# Altium PCB BPQ.PcbDoc (part 2 of 2)
Units mm, origin at the board's own origin, x right, y up, seen from the top; angles counter-clockwise.
Board outline 200.03 x 149.99 mm, 2 copper layers (Top Layer, Bottom Layer); 132 components, 80 nets, 460 pads, 79 vias.
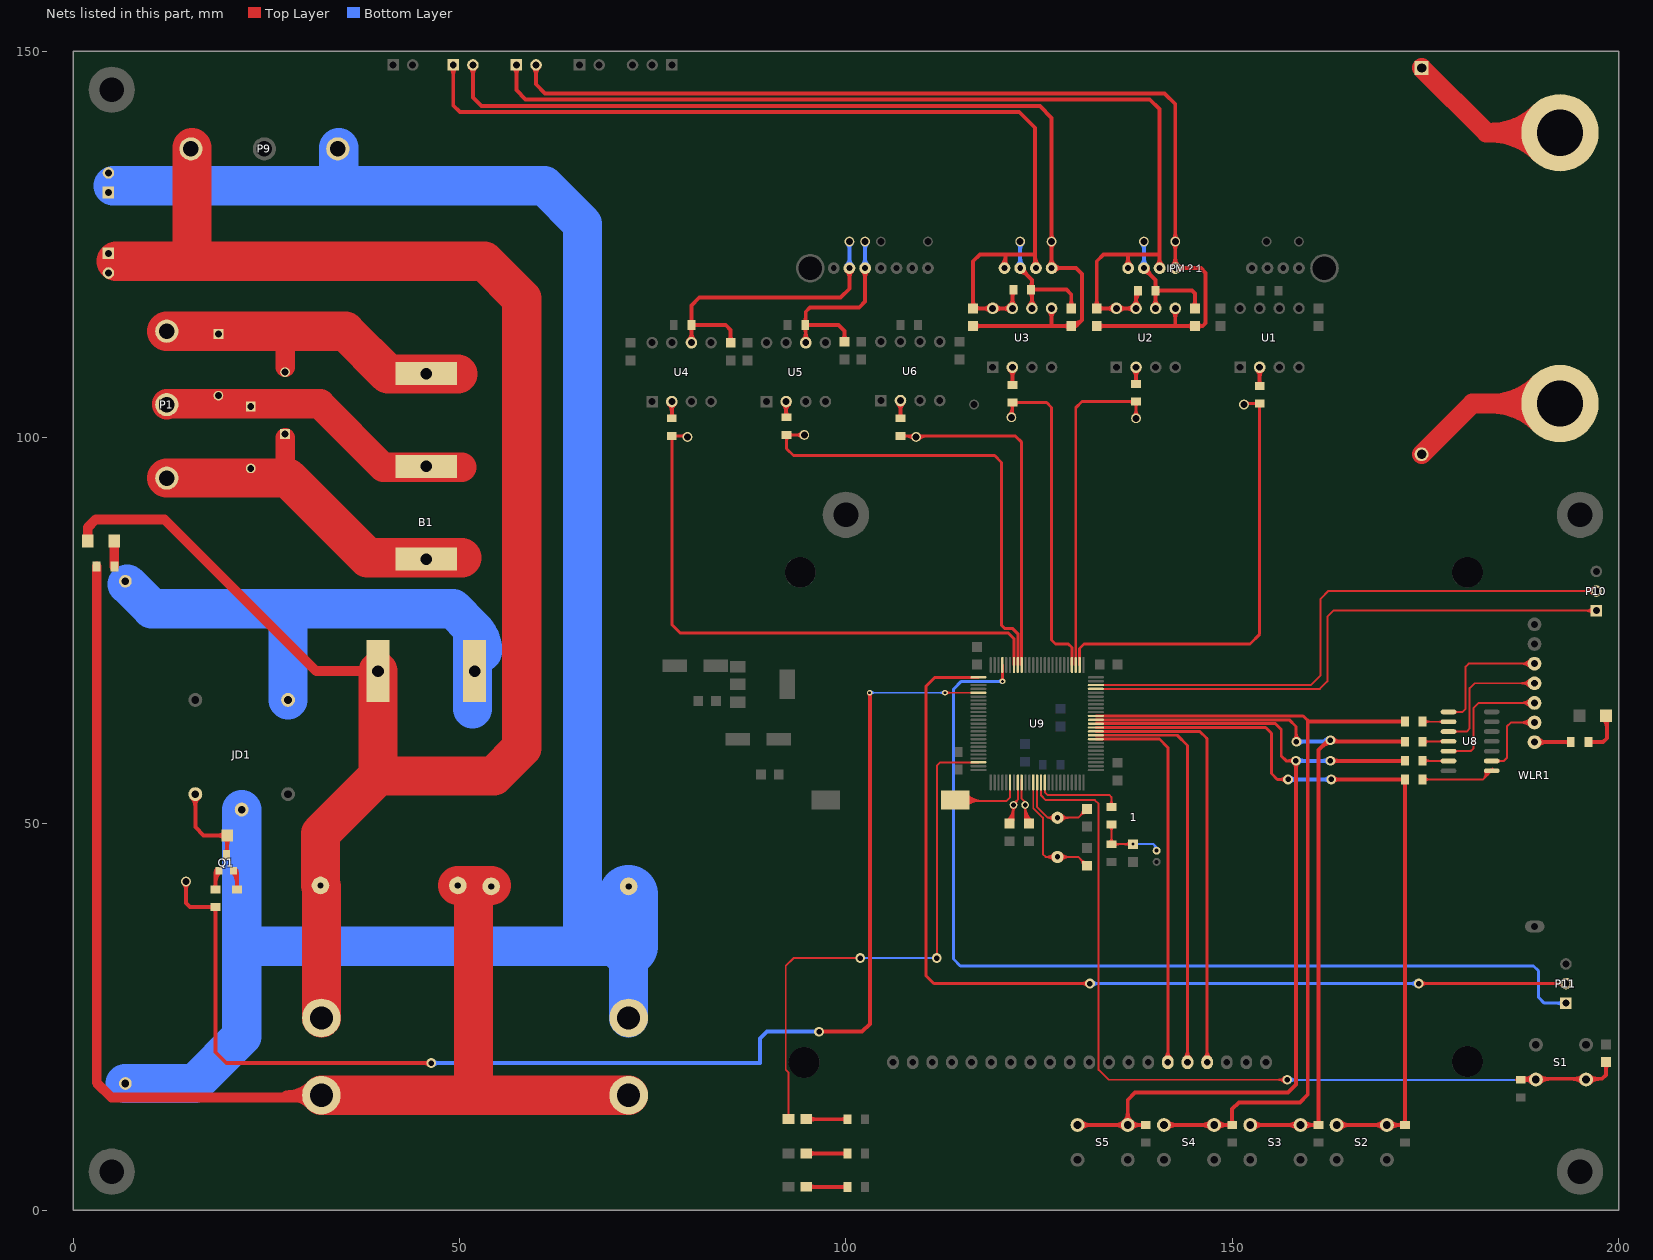
[diagram p2: the nets of this part, all layers, seen from the top]

## Via types
v1: diameter 0.635, hole 0.635, Top Layer to Bottom Layer, 40 vias
v2: diameter 1.27, hole 0.711, Top Layer to Bottom Layer, 23 vias
v3: diameter 0.762, hole 0.381, Top Layer to Bottom Layer, 15 vias
v4: diameter 1.016, hole 0.61, Top Layer to Bottom Layer, 1 vias

## Nets (pads, with @x,y where several pads share a name; then routed paths per layer and width w, separated by ;. In a path a pad name is that pad's centre, name@x,y a point inside that pad or via, vN(x,y) a via of type N, cw(c..) or ccw(c..) an arc to the next point about the centre after c; other vN are vias at no path point) (continued)
IPM_VGND: C2.1 C8.1 IPM？1.5 P4.2 TP15.0 U2.5 | length 149.6
  Top Layer w0.508: P4.2@59.551,147.858 cw(c58.704,147.012) 59.902,147.012 cw(c61.099,147.012) P4.2@60.252,147.858 ; P4.2@59.902,148.209 59.902,145.711 61.087,144.526 141.224,144.526 142.621,143.129 IPM？1.5@142.621,121.92 145.923,121.92 146.558,121.285 146.558,114.808 146.177,114.427 C8.1@145.161,114.427 142.621,114.427 ; C2.1@132.461,114.427 142.621,114.427 ; C2.1@132.73,114.158 cw(c133.381,113.507) 133.381,114.427 cw(c133.381,115.347) C2.1@132.73,114.696 ; IPM？1.5@142.262,122.279 ccw(c141.395,123.146) 142.621,123.146 ccw(c143.847,123.146) 142.98,122.279 ccw(c143.847,123.146) 143.847,121.92 ccw(c143.847,120.694) IPM？1.5@142.98,121.561 ; U2.5@142.27,116.362 cw(c141.424,115.516) 142.621,115.516 cw(c143.818,115.516) U2.5@142.972,116.362 ; TP15.0@142.352,125.08 cw(c141.701,124.429) 142.621,124.429 cw(c143.541,124.429) TP15.0@142.89,125.08 ; TP15.0@142.352,125.618 ccw(c141.701,126.269) 142.621,126.269 ccw(c143.541,126.269) TP15.0@142.89,125.618 ; U2.5@142.621,116.713 142.621,114.427 ; C8.1@144.892,114.158 ccw(c144.241,113.507) 144.241,114.427 ccw(c144.241,115.347) C8.1@144.892,114.696 ; C8.1@145.43,114.158 cw(c146.081,113.507) 146.081,114.427 cw(c146.081,115.347) C8.1@145.43,114.696
IPM_VN: C11.2 IPM？1.17 R14.2 TP11.0 U5.6 | length 37.6
  Top Layer w0.508: U5.6@94.455,112.619 ccw(c93.608,113.465) 94.805,113.465 ccw(c96.003,113.465) U5.6@95.156,112.619 ; R14.2@94.562,114.247 cw(c93.975,113.66) 94.805,113.66 ; R14.2@94.562,114.861 ccw(c93.975,115.448) 94.805,115.448 ; U5.6@94.805,112.268 R14.2@94.805,114.554 ; R14.2@94.922,114.374 cw(c95.355,113.941) 95.355,114.554 cw(c95.355,115.167) R14.2@94.922,114.734 ; C11.2@99.553,112.664 ccw(c98.902,113.315) 99.822,113.315 ccw(c100.742,113.315) C11.2@100.091,112.664 ; C11.2@99.822,112.395 99.822,113.792 99.06,114.554 R14.2@94.805,114.554 ; IPM？1.17@102.13,121.561 cw(c101.263,120.694) 102.489,120.694 cw(c103.715,120.694) IPM？1.17@102.848,121.561 ; IPM？1.17@102.489,121.92 102.489,117.602 101.727,116.84 95.377,116.84 94.805,116.268 R14.2@94.805,114.554
  Bottom Layer w0.508: IPM？1.17@102.13,122.279 ccw(c101.263,123.146) 102.489,123.146 ccw(c103.715,123.146) IPM？1.17@102.848,122.279 ; TP11.0@102.22,125.08 cw(c101.569,124.429) 102.489,124.429 cw(c103.409,124.429) TP11.0@102.758,125.08 ; IPM？1.17@102.489,121.92 TP11.0@102.489,125.349
IPM_VP: C8.2 IPM？1.7 R11.2 TP8.0 U2.6 | length 27.9
  Top Layer w0.508: IPM？1.7@138.557,121.412 cw(c138.557,120.186) 139.424,121.053 cw(c140.291,121.92) IPM？1.7@139.065,121.92 ; IPM？1.7@138.557,121.92 140.081,120.396 R11.2@140.081,118.999 ; U2.6@139.73,117.064 ccw(c138.884,117.91) 140.081,117.91 ccw(c141.278,117.91) U2.6@140.432,117.064 ; R11.2@139.901,118.692 cw(c139.468,118.259) 140.081,118.259 cw(c140.694,118.259) R11.2@140.261,118.692 ; R11.2@139.901,119.306 ccw(c139.468,119.739) 140.081,119.739 ccw(c140.694,119.739) R11.2@140.261,119.306 ; U2.6@140.081,116.713 R11.2@140.081,118.999 ; R11.2@140.261,118.819 cw(c140.694,118.386) 140.694,118.999 cw(c140.694,119.612) R11.2@140.261,119.179 ; C8.2@144.892,116.982 ccw(c144.241,117.633) 145.161,117.633 ccw(c146.081,117.633) C8.2@145.43,116.982 ; C8.2@145.161,116.713 145.161,118.618 144.78,118.999 R11.2@140.081,118.999
  Bottom Layer w0.508: IPM？1.7@138.198,122.279 ccw(c137.331,123.146) 138.557,123.146 ccw(c139.783,123.146) IPM？1.7@138.916,122.279 ; TP8.0@138.288,125.08 cw(c137.637,124.429) 138.557,124.429 cw(c139.477,124.429) TP8.0@138.826,125.08 ; IPM？1.7@138.557,121.92 TP8.0@138.557,125.349
IPM_VVCC: C2.2 IPM？1.6 IPM？1.8 P4.1 R11.1 U2.7 U2.8 | length 148.9
  Top Layer w0.508: P4.1@57.011,147.858 cw(c56.164,147.012) 57.362,147.012 cw(c58.559,147.012) P4.1@57.712,147.858 ; P4.1@57.362,148.209 57.362,144.949 58.547,143.764 139.319,143.764 140.589,142.494 140.589,123.825 ; C2.2@132.192,116.982 ccw(c131.541,117.633) 132.461,117.633 ccw(c133.381,117.633) 132.73,116.982 ccw(c133.381,117.633) 133.381,116.713 ccw(c133.381,115.793) C2.2@132.73,116.444 ; U2.8@134.65,116.362 ccw(c133.804,115.516) 133.804,116.713 ccw(c133.804,117.91) U2.8@134.65,117.064 ; U2.8@135.352,116.362 cw(c136.198,115.516) 136.198,116.713 cw(c136.198,117.91) U2.8@135.352,117.064 ; IPM？1.8@136.166,122.279 ccw(c135.299,123.146) 136.525,123.146 ccw(c137.751,123.146) IPM？1.8@136.884,122.279 ; IPM？1.8@136.525,121.92 136.525,123.571 ; U2.7@137.19,116.362 ccw(c136.344,115.516) 136.344,116.713 ccw(c136.344,117.91) 137.19,117.064 ccw(c136.344,117.91) 137.541,117.91 ccw(c138.738,117.91) U2.7@137.892,117.064 ; 137.541,117.646 cw(c139.021,117.646) R11.1@137.975,118.692 ; R11.1@137.541,118.872 U2.7@137.541,116.713 U2.8@135.001,116.713 C2.2@132.461,116.713 132.461,122.809 133.35,123.698 140.462,123.698 140.589,123.825 ; IPM？1.6@140.23,122.279 ccw(c139.363,123.146) 140.589,123.146 ccw(c141.815,123.146) IPM？1.6@140.948,122.279 ; IPM？1.6@140.589,121.92 140.589,123.825
IPM_WGND: C3.1 C9.1 IPM？1.9 P5.2 TP16.0 U3.5 | length 142.1
  Top Layer w0.508: P5.2@51.381,147.858 cw(c50.534,147.012) 51.731,147.012 cw(c52.929,147.012) P5.2@52.082,147.858 ; P5.2@51.731,148.209 51.731,143.976 52.832,142.875 125.095,142.875 126.619,141.351 IPM？1.9@126.619,121.92 129.794,121.92 130.556,121.158 130.556,115.189 ; C3.1@116.459,114.427 C9.1@129.159,114.427 129.794,114.427 130.556,115.189 ; C3.1@116.728,114.158 cw(c117.379,113.507) 117.379,114.427 cw(c117.379,115.347) C3.1@116.728,114.696 ; IPM？1.9@126.26,122.279 ccw(c125.393,123.146) 126.619,123.146 ccw(c127.845,123.146) 126.978,122.279 ccw(c127.845,123.146) 127.845,121.92 ccw(c127.845,120.694) IPM？1.9@126.978,121.561 ; U3.5@126.268,116.362 cw(c125.422,115.516) 126.619,115.516 cw(c127.816,115.516) U3.5@126.97,116.362 ; TP16.0@126.35,125.08 cw(c125.699,124.429) 126.619,124.429 cw(c127.539,124.429) TP16.0@126.888,125.08 ; TP16.0@126.35,125.618 ccw(c125.699,126.269) 126.619,126.269 ccw(c127.539,126.269) TP16.0@126.888,125.618 ; 126.619,114.554 U3.5@126.619,116.713 ; C9.1@128.89,114.158 ccw(c128.239,113.507) 128.239,114.427 ccw(c128.239,115.347) C9.1@128.89,114.696 ; C9.1@129.132,114.303 ccw(c129.307,115.117) 129.895,114.528 ; C9.1@129.239,114.8 ccw(c129.539,116.206) 130.556,115.189
IPM_WN: C10.2 IPM？1.18 R13.2 TP10.0 U4.6 | length 50.8
  Top Layer w0.508: U4.6@79.659,112.619 ccw(c78.813,113.465) 80.01,113.465 ccw(c81.207,113.465) U4.6@80.361,112.619 ; R13.2@79.83,114.247 cw(c79.397,113.814) 80.01,113.814 cw(c80.623,113.814) R13.2@80.19,114.247 ; R13.2@79.83,114.861 ccw(c79.397,115.294) 80.01,115.294 ccw(c80.623,115.294) R13.2@80.19,114.861 ; U4.6@80.01,112.268 R13.2@80.01,114.554 ; R13.2@80.19,114.374 cw(c80.623,113.941) 80.623,114.554 cw(c80.623,115.167) R13.2@80.19,114.734 ; C10.2@84.821,112.537 ccw(c84.17,113.188) 85.09,113.188 ccw(c86.01,113.188) C10.2@85.359,112.537 ; C10.2@85.09,112.268 85.09,113.919 84.455,114.554 R13.2@80.01,114.554 ; IPM？1.18@100.098,121.561 cw(c99.231,120.694) 100.457,120.694 cw(c101.683,120.694) IPM？1.18@100.816,121.561 ; IPM？1.18@100.457,121.92 100.457,119.253 99.314,118.11 81.026,118.11 80.01,117.094 R13.2@80.01,114.554
  Bottom Layer w0.508: IPM？1.18@100.098,122.279 ccw(c99.231,123.146) 100.457,123.146 ccw(c101.683,123.146) IPM？1.18@100.816,122.279 ; TP10.0@100.188,125.08 cw(c99.537,124.429) 100.457,124.429 cw(c101.377,124.429) TP10.0@100.726,125.08 ; IPM？1.18@100.457,121.92 TP10.0@100.457,125.349
IPM_WP: C9.2 IPM？1.11 R12.2 TP9.0 U3.6 | length 27.7
  Top Layer w0.508: IPM？1.11@122.555,121.412 cw(c122.555,120.186) 123.422,121.053 cw(c124.289,121.92) IPM？1.11@123.063,121.92 ; IPM？1.11@122.555,121.92 124.079,120.396 R12.2@124.079,119.126 ; U3.6@123.728,117.064 ccw(c122.882,117.91) 124.079,117.91 ccw(c125.276,117.91) U3.6@124.43,117.064 ; R12.2@123.772,118.819 cw(c123.032,118.079) 124.079,118.079 ; R12.2@123.772,119.433 ccw(c123.032,120.173) 124.079,120.173 ; R12.2@123.952,119.126 R12.2@124.079,119.126 ; U3.6@124.079,116.713 R12.2@124.079,119.126 ; R12.2@124.132,118.946 cw(c124.565,118.513) 124.565,119.126 cw(c124.565,119.739) R12.2@124.132,119.306 ; C9.2@128.89,116.982 ccw(c128.239,117.633) 129.159,117.633 ccw(c130.079,117.633) C9.2@129.428,116.982 ; C9.2@129.159,116.713 129.159,118.491 128.524,119.126 R12.2@124.079,119.126
  Bottom Layer w0.508: IPM？1.11@122.196,122.279 ccw(c121.329,123.146) 122.555,123.146 ccw(c123.781,123.146) IPM？1.11@122.914,122.279 ; TP9.0@122.286,125.08 cw(c121.635,124.429) 122.555,124.429 cw(c123.475,124.429) TP9.0@122.824,125.08 ; IPM？1.11@122.555,121.92 TP9.0@122.555,125.349
IPM_WVCC: C3.2 IPM？1.10 IPM？1.12 P5.1 R12.1 U3.7 U3.8 | length 140.5
  Top Layer w0.508: P5.1@48.841,147.858 cw(c47.994,147.012) 49.191,147.012 cw(c50.389,147.012) P5.1@49.542,147.858 ; P5.1@49.191,148.209 49.191,142.96 50.038,142.113 122.428,142.113 124.46,140.081 124.46,139.954 124.46,123.698 ; C3.2@116.19,116.982 ccw(c115.539,117.633) 116.459,117.633 ccw(c117.379,117.633) 116.728,116.982 ccw(c117.379,117.633) 117.379,116.713 ccw(c117.379,115.793) C3.2@116.728,116.444 ; U3.8@118.648,116.362 ccw(c117.802,115.516) 117.802,116.713 ccw(c117.802,117.91) U3.8@118.648,117.064 ; U3.8@119.35,116.362 cw(c120.196,115.516) 120.196,116.713 cw(c120.196,117.91) U3.8@119.35,117.064 ; IPM？1.12@120.164,122.279 ccw(c118.99,123.453) 120.65,123.453 ; IPM？1.12@120.523,121.92 120.65,122.047 120.65,123.698 ; 120.65,122.84 ccw(c121.443,122.84) IPM？1.12@120.882,122.279 ; U3.7@121.188,116.362 ccw(c120.342,115.516) 120.342,116.713 ccw(c120.342,117.91) 121.188,117.064 ccw(c120.342,117.91) 121.539,117.91 ccw(c122.736,117.91) U3.7@121.89,117.064 ; 121.539,118.079 cw(c122.586,118.079) R12.1@121.846,118.819 ; R12.1@121.539,119.126 U3.7@121.539,116.713 U3.8@118.999,116.713 C3.2@116.459,116.713 116.459,122.809 117.348,123.698 120.65,123.698 ; IPM？1.10@124.228,122.279 ccw(c123.667,122.84) 124.46,122.84 ; IPM？1.10@124.46,122.047 124.46,123.698 ; 124.46,123.453 ccw(c126.12,123.453) IPM？1.10@124.946,122.279 ; 120.65,123.698 124.46,123.698
JDQ_SWITCH: R21.2 TP18.0 U9.80 | length 181.3
  Top Layer w0.254: v3(112.819,66.972) U9.80@117.145,66.972 ; v3@112.999,66.792 cw(c113.432,66.359) 113.432,66.972 cw(c113.432,67.585) v3@112.999,67.152
  Top Layer w0.508: TP18.0@14.336,42.276 cw(c13.685,41.625) 14.605,41.625 cw(c15.525,41.625) TP18.0@14.874,42.276 ; TP18.0@14.605,42.545 14.605,39.751 15.113,39.243 R21.2@18.415,39.243 18.415,20.447 19.812,19.05 v2(46.355,19.05) ; R21.2@18.108,39.063 ccw(c17.675,38.63) 17.675,39.243 ccw(c17.675,39.856) R21.2@18.108,39.423 ; R21.2@18.235,39.063 cw(c17.802,38.63) 18.415,38.63 cw(c19.028,38.63) R21.2@18.595,39.063 ; v2@46.086,18.781 ccw(c45.435,18.13) 45.435,19.05 ccw(c45.435,19.97) v2@46.086,19.319 ; v2(96.52,23.114) 102.108,23.114 103.124,24.13 v3@103.124,66.972 ; v3@102.991,66.882 cw(c102.671,66.562) 103.124,66.562
  Bottom Layer w0.254: v3(103.081,66.972) v3(112.819,66.972) ; v3@103.261,66.792 cw(c103.694,66.359) 103.694,66.972 cw(c103.694,67.585) v3@103.261,67.152 ; v3@112.639,66.792 ccw(c112.206,66.359) 112.206,66.972 ccw(c112.206,67.585) v3@112.639,67.152
  Bottom Layer w0.508: v2(46.355,19.05) 88.9,19.05 88.9,22.225 89.789,23.114 v2(96.52,23.114) ; v2@46.624,18.781 cw(c47.275,18.13) 47.275,19.05 cw(c47.275,19.97) v2@46.624,19.319
KEY_BACK: R29.1 RW2.1 S2.1 U9.37 | length 116.8
  Top Layer w0.381: U9.37@132.345,62.472 154.317,62.472 155.067,61.722 155.067,56.515 155.829,55.753 v2(157.226,55.753) ; v2@156.912,55.439 ccw(c156.153,54.68) 156.153,55.753 ccw(c156.153,56.826) v2@156.912,56.067
  Top Layer w0.508: v2(162.814,55.753) RW2.1@172.339,55.753 R29.1@172.339,11.049 ; v2@163.083,55.484 cw(c163.734,54.833) 163.734,55.753 cw(c163.734,56.673) v2@163.083,56.022 ; S2.1@163.501,11.038 S2.1@170.001,11.038 ; S2.1@163.958,10.581 cw(c165.061,9.478) 165.061,11.038 cw(c165.061,12.598) S2.1@163.958,11.495 ; S2.1@169.544,10.581 ccw(c168.441,9.478) 168.441,11.038 ccw(c168.441,12.598) S2.1@169.544,11.495 ; S2.1@170.012,11.049 R29.1@172.339,11.049 ; S2.1@170.458,10.581 cw(c171.587,9.452) 171.587,11.049 ; S2.1@170.458,11.495 ccw(c171.534,12.571) 171.534,11.049 ; R29.1@172.032,10.869 ccw(c171.599,10.436) 171.599,11.049 ccw(c171.599,11.662) R29.1@172.032,11.229 ; R29.1@172.159,11.229 ccw(c171.726,11.662) 172.339,11.662 ccw(c172.952,11.662) R29.1@172.519,11.229 ; RW2.1@172.159,55.446 cw(c171.726,55.013) 172.339,55.013 cw(c172.952,55.013) RW2.1@172.519,55.446 ; RW2.1@172.159,55.573 ccw(c171.726,55.14) 171.726,55.753 ccw(c171.726,56.366) RW2.1@172.159,55.933 ; R29.1@172.339,10.795 R29.1@172.339,11.049
  Bottom Layer w0.508: v2(157.226,55.753) v2(162.814,55.753) ; v2@157.495,55.484 cw(c158.146,54.833) 158.146,55.753 cw(c158.146,56.673) v2@157.495,56.022 ; v2@162.545,55.484 ccw(c161.894,54.833) 161.894,55.753 ccw(c161.894,56.673) v2@162.545,56.022
KEY_DOWN: R30.1 RW4.1 S3.1 U9.39 | length 118.5
  Top Layer w0.381: U9.39@132.345,63.472 157.381,63.472 158.242,62.611 v2@158.242,60.96 ; v2@157.991,60.957 ccw(c157.386,61.562) 158.242,61.562 ; 158.242,61.869 ccw(c159.532,61.869) v2@158.62,60.957
  Top Layer w0.508: S3.1@152.325,11.038 S3.1@158.825,11.038 ; S3.1@152.782,10.581 cw(c153.885,9.478) 153.885,11.038 cw(c153.885,12.598) S3.1@152.782,11.495 ; S3.1@158.368,10.581 ccw(c157.265,9.478) 157.265,11.038 ccw(c157.265,12.598) S3.1@158.368,11.495 ; S3.1@158.836,11.049 R30.1@161.163,11.049 161.163,59.563 162.243,60.642 162.496,60.642 RW4.1@172.339,60.642 ; S3.1@159.282,10.581 cw(c160.411,9.452) 160.411,11.049 ; S3.1@159.282,11.495 ccw(c160.358,12.571) 160.358,11.049 ; R30.1@160.856,10.869 ccw(c160.423,10.436) 160.423,11.049 ccw(c160.423,11.662) R30.1@160.856,11.229 ; R30.1@160.983,11.229 ccw(c160.55,11.662) 161.163,11.662 ccw(c161.776,11.662) R30.1@161.343,11.229 ; 161.603,60.003 cw(c162.687,58.919) v2@162.687,60.452 ; v2@162.956,61.102 ccw(c164.067,62.213) 164.067,60.642 ; RW4.1@172.159,60.463 ccw(c171.726,60.029) 171.726,60.642 ccw(c171.726,61.256) RW4.1@172.159,60.822
  Bottom Layer w0.508: v2@158.242,60.706 v2(158.305,60.642) 162.496,60.642 v2(162.687,60.833) ; v2@158.575,60.373 cw(c159.225,59.723) 159.225,60.642 cw(c159.225,61.562) v2@158.575,60.912 ; 161.307,60.642 ccw(c161.307,62.213) v2@162.418,61.102
KEY_SET: R32.1 RW3.1 S5.1 U9.38 | length 139.8
  Top Layer w0.381: U9.38@132.345,62.972 155.595,62.972 156.337,62.23 156.337,58.801 156.972,58.166 v2(158.242,58.166) ; v2@157.928,57.852 ccw(c157.169,57.093) 157.169,58.166 ccw(c157.169,59.239) v2@157.928,58.48
  Top Layer w0.508: S5.1@129.973,11.038 S5.1@136.473,11.038 ; S5.1@130.43,10.581 cw(c131.533,9.478) 131.533,11.038 cw(c131.533,12.598) S5.1@130.43,11.495 ; S5.1@136.016,10.581 ccw(c134.913,9.478) 134.913,11.038 ccw(c134.913,12.598) 136.016,11.495 ccw(c134.913,12.598) 136.473,12.598 ccw(c138.033,12.598) 136.93,11.495 ccw(c138.033,12.598) 138.033,11.038 ccw(c138.033,9.478) S5.1@136.93,10.581 ; 138.044,11.038 ccw(c138.044,11.689) R32.1@138.504,11.229 ; 138.097,11.038 cw(c138.097,10.462) R32.1@138.504,10.869 ; R32.1@138.8,11.038 S5.1@136.473,11.038 ; v2@157.973,57.897 cw(c157.322,57.246) 158.242,57.246 cw(c159.162,57.246) v2@158.511,57.897 ; v2(158.242,58.166) 158.242,16.256 157.226,15.24 137.414,15.24 136.473,14.299 S5.1@136.473,11.038 ; v2(162.687,58.166) RW3.1@172.339,58.166 ; v2@162.956,57.897 cw(c163.607,57.246) 163.607,58.166 cw(c163.607,59.086) v2@162.956,58.435 ; RW3.1@172.159,57.986 ccw(c171.726,57.553) 171.726,58.166 ccw(c171.726,58.779) RW3.1@172.159,58.346
  Bottom Layer w0.508: v2(158.242,58.166) v2(162.687,58.166) ; v2@158.511,57.897 cw(c159.162,57.246) 159.162,58.166 cw(c159.162,59.086) v2@158.511,58.435 ; v2@162.418,57.897 ccw(c161.767,57.246) 161.767,58.166 ccw(c161.767,59.086) v2@162.418,58.435
KEY_UP: R31.1 RW5.1 S4.1 U9.40 | length 120.2
  Top Layer w0.381: U9.40@132.345,63.972 159.167,63.972 159.766,63.373
  Top Layer w0.508: S4.1@141.149,11.038 S4.1@147.649,11.038 ; S4.1@141.606,10.581 cw(c142.709,9.478) 142.709,11.038 cw(c142.709,12.598) S4.1@141.606,11.495 ; S4.1@147.192,10.581 ccw(c146.089,9.478) 146.089,11.038 ccw(c146.089,12.598) S4.1@147.192,11.495 ; S4.1@147.66,11.049 R31.1@149.987,11.049 149.987,13.081 150.876,13.97 158.75,13.97 159.766,14.986 159.766,63.373 ; S4.1@148.106,10.581 cw(c149.235,9.452) 149.235,11.049 ; S4.1@148.106,11.495 ccw(c149.182,12.571) 149.182,11.049 ; R31.1@149.68,10.869 ccw(c149.247,10.436) 149.247,11.049 ccw(c149.247,11.662) R31.1@149.68,11.229 ; R31.1@149.807,11.229 ccw(c149.374,11.662) 149.987,11.662 ccw(c150.6,11.662) R31.1@150.167,11.229 ; 159.893,63.246 RW5.1@172.339,63.246 ; RW5.1@172.159,63.066 ccw(c171.726,62.633) 171.726,63.246 ccw(c171.726,63.859) RW5.1@172.159,63.426
LCD_CS: 1.4 U9.36 | length 58.9
  Top Layer w0.381: U9.36@132.345,61.972 145.8,61.972 146.738,61.034 ; 1.4@146.334,19.702 ccw(c145.358,20.678) 146.738,20.678 ccw(c148.118,20.678) 1.4@147.142,19.702 ; 146.685,61.087 146.738,61.034 ; 1.4@146.738,19.16 146.738,61.034
LCD_SCLK: 1.6 U9.34 | length 52.7
  Top Layer w0.381: U9.34@132.345,60.972 140.577,60.972 141.658,59.891 1.6@141.658,19.16 ; 1.6@141.254,19.702 ccw(c140.278,20.678) 141.658,20.678 ccw(c143.038,20.678) 1.6@142.062,19.702
LCD_SID: 1.5 U9.35 | length 55.6
  Top Layer w0.381: U9.35@132.345,61.472 142.871,61.472 144.198,60.145 1.5@144.198,19.16 ; 1.5@143.794,19.702 ccw(c142.818,20.678) 144.198,20.678 ccw(c145.578,20.678) 1.5@144.602,19.702
N: B1.2 CP2.2 L1.2 P7.1 P7.2 P9.3 R18.1 | length 246.9
  Top Layer w1.27: L1.2@1.905,86.614 1.905,88.392 2.921,89.408 11.811,89.408 31.451,69.768 B1.2@39.448,69.768 ; B1.2@38.836,69.156 ccw(c37.36,67.68) 37.36,69.768 ccw(c37.36,71.856) B1.2@38.836,70.38
  Top Layer w5.08: 5.588,122.809 16.129,122.809 ; P9.3@15.378,137.479 15.378,123.56 16.129,122.809 ; CP2.2@32.131,24.892 32.131,41.91 R18.1@32.004,42.037 32.004,48.768 39.448,56.212 ; B1.2@39.448,69.768 39.448,56.212 ; 16.129,122.809 53.213,122.809 58.039,117.983 58.039,59.817 54.434,56.212 39.448,56.212
NetB1_1: B1.1 JD1.4 R16.1 | length 75.9
  Bottom Layer w5.08: R16.1@7.016,81.026 10.191,77.851 27.94,77.851 ; JD1.4@27.813,66.048 27.813,77.724 27.94,77.851 ; 51.689,64.897 51.689,75.311 49.149,77.851 27.94,77.851 ; 51.755,75.245 cw(c48.778,72.268) 52.988,72.268 ccw(c48.778,72.268) 51.755,75.245
NetB1_3: B1.3 P1.3 R7.2 R9.1 | length 47.8
  Top Layer w2.54: R9.1@27.432,99.949 27.432,95.123 27.802,94.753
  Top Layer w5.08: P1.3@12.127,94.753 22.987,94.753 27.802,94.753 38.1,84.455 50.292,84.455
NetB1_4: B1.4 P1.2 R7.1 R8.2 | length 41.5
  Top Layer w3.81: P1.2@12.127,104.253 P1.2@12.141,104.267 ; P1.2@12.141,104.343 32.004,104.343 ; 32.004,104.267 40.132,96.139 50.292,96.139
NetB1_5: B1.5 P1.1 R8.1 R9.2 | length 44.7
  Top Layer w2.54: 27.432,109.093 27.432,113.626 27.559,113.753
  Top Layer w5.08: P1.1@12.127,113.753 18.796,113.753 27.559,113.753 35.218,113.753 40.767,108.204 49.784,108.204
NetC15_1: C15.1 IPM？1.20 | length 35.5
  Top Layer w2.54: C15.1@174.498,147.828 182.88,139.446 IPM？1.20@192.405,139.446 ; IPM？1.20@189.768,136.809 ccw(c183.4,130.441) 183.4,139.446 ccw(c183.4,148.451) IPM？1.20@189.768,142.084
NetC15_2: C15.2 IPM？1.21 | length 34.8
  Top Layer w2.54: C15.2@174.498,97.828 181.064,104.394 IPM？1.21@192.405,104.394 ; IPM？1.21@189.768,101.757 ccw(c183.4,95.389) 183.4,104.394 ccw(c183.4,113.399) IPM？1.21@189.768,107.032
NetC21_2: C21.2 R27.2 R28.2 R_RM1.2 | length 18.5
  Top Layer w0.254: R27.2@134.097,47.64 ccw(c133.446,48.291) 134.366,48.291 ccw(c135.286,48.291) R27.2@134.635,47.64 ; R28.2@134.097,49.642 cw(c133.446,48.991) 134.366,48.991 cw(c135.286,48.991) R28.2@134.635,49.642 ; R28.2@134.366,49.911 R27.2@134.366,47.371 v3(137.16,47.371) ; R27.2@134.762,47.102 cw(c135.413,46.451) 135.413,47.371 cw(c135.413,48.291) R27.2@134.762,47.64 ; C21.2@136.801,47.012 ccw(c135.934,46.145) 135.934,47.371 ccw(c135.934,48.597) C21.2@136.801,47.73 ; C21.2@136.98,47.191 ccw(c136.547,46.758) 136.547,47.371 ccw(c136.547,47.984) C21.2@136.98,47.551
  Bottom Layer w0.254: v3(137.16,47.371) 139.827,47.371 ; v3@137.34,47.191 cw(c137.773,46.758) 137.773,47.371 cw(c137.773,47.984) v3@137.34,47.551 ; R_RM1.2@139.89,46.743 ccw(c139.474,47.018) 139.827,47.371 ; 140.047,47.151 cw(c139.739,46.843) R_RM1.2@140.102,46.603 ; R_RM1.2@140.208,46.533 140.208,46.99 139.827,47.371
NetCP1_2: CP1.2 CP2.1 R17.1 R18.2 R19.2 | length 173
  Top Layer w1.27: R19.2@3.048,83.312 3.048,16.51 4.953,14.605 31.844,14.605 CP2.1@32.131,14.892 ; CP2.1@30.812,13.573 ccw(c27.629,10.389) 27.629,14.892 ccw(c27.629,19.394) CP2.1@30.812,16.211
  Top Layer w5.08: CP2.1@32.131,14.892 51.816,14.892 ; R18.2@49.784,42.037 R17.1@54.102,42.037 ; 51.816,40.005 51.816,14.892 ; CP1.2@71.882,14.892 51.816,14.892
NetD1_2: D1.2 JD1.2 Q1.C | length 18.5
  Top Layer w0.508: JD1.2@15.356,53.391 cw(c14.253,52.288) 15.813,52.288 cw(c17.373,52.288) JD1.2@16.27,53.391 ; JD1.2@15.813,53.848 15.813,49.592 16.891,48.514 D1.2@19.939,48.514 19.939,45.974 Q1.C@19.825,45.974 ; D1.2@19.58,48.873 cw(c18.713,49.74) 18.713,48.514 cw(c18.713,47.288) 19.58,48.155 cw(c18.713,47.288) 19.939,47.288 cw(c21.165,47.288) D1.2@20.298,48.155 ; Q1.C@19.681,46.295 ccw(c19.058,46.918) 19.939,46.918
NetD2_1: D2.1 R22.2 | length 7.7
  Top Layer w0.508: D2.1@94.894,11.786 R22.2@100.203,11.786 ; D2.1@95.265,11.542 cw(c95.854,10.953) 95.854,11.786 ; D2.1@95.265,12.08 ccw(c95.977,12.792) 95.977,11.786 ; R22.2@100.023,11.606 ccw(c99.59,11.172) 99.59,11.786 ccw(c99.59,12.399) R22.2@100.023,11.965
NetD3_1: D3.1 R25.2 | length 7.8
  Top Layer w0.508: D3.1@94.869,7.366 94.894,7.341 R25.2@100.203,7.341 ; D3.1@95.265,7.097 cw(c95.854,6.508) 95.854,7.341 ; D3.1@95.265,7.635 ccw(c95.977,8.347) 95.977,7.341 ; R25.2@100.023,7.161 ccw(c99.59,6.727) 99.59,7.341 ccw(c99.59,7.954) R25.2@100.023,7.52
NetD4_1: D4.1 R26.2 | length 7.7
  Top Layer w0.508: D4.1@94.894,3.023 R26.2@100.203,3.023 ; D4.1@95.265,2.779 cw(c95.854,2.19) 95.854,3.023 ; D4.1@95.265,3.317 ccw(c95.977,4.029) 95.977,3.023 ; R26.2@100.023,2.843 ccw(c99.59,2.409) 99.59,3.023 ccw(c99.59,3.636) R26.2@100.023,3.202
NetDVT1_1: DVT1.1 RW1.2 | length 8.6
  Top Layer w0.508: RW1.2@195.961,60.579 197.993,60.579 198.501,61.087 198.501,63.881 DVT1.1@198.374,64.008 ; RW1.2@196.268,60.399 cw(c196.701,59.966) 196.701,60.579 cw(c196.701,61.192) RW1.2@196.268,60.759 ; DVT1.1@198.015,63.585 cw(c196.841,62.411) 198.501,62.411 ; 198.501,63.025 cw(c199.294,63.025) DVT1.1@198.733,63.585
NetL1_1: L1.1 R19.1 | length 3.3
  Top Layer w1.27: R19.1@5.334,83.312 L1.1@5.334,86.614
NetQ1_B: Q1.B R21.1 | length 5.8
  Top Layer w0.508: R21.1@18.235,41.709 ccw(c17.802,42.142) 18.415,42.142 ccw(c19.028,42.142) R21.1@18.595,41.709 ; R21.1@18.415,41.529 18.415,43.498 Q1.B@18.86,43.942 ; 18.415,42.378 cw(c20.423,42.378) Q1.B@19.003,43.798 ; Q1.B@18.415,43.605 cw(c19.197,43.605) Q1.B@18.644,44.158
NetQ1_E: Q1.E R20.1 | length 5.9
  Top Layer w0.508: Q1.E@20.621,43.798 cw(c19.201,42.378) 21.209,42.378 ; Q1.E@20.765,43.942 21.209,43.498 21.209,41.783 R20.1@20.955,41.529 ; Q1.E@20.98,44.158 cw(c20.427,43.605) Q1.E@21.209,43.605 ; R20.1@21.029,41.709 ccw(c20.596,42.142) 21.209,42.142 ccw(c21.822,42.142) R20.1@21.389,41.709
NetR1_2: R1.2 U1.2 | length 5.3
  Top Layer w0.508: U1.2@153.192,108.742 cw(c152.346,107.896) 153.543,107.896 cw(c154.74,107.896) U1.2@153.894,108.742 ; R1.2@153.363,106.86 ccw(c152.93,107.293) 153.543,107.293 ccw(c154.156,107.293) R1.2@153.723,106.86 ; R1.2@153.543,106.68 U1.2@153.543,109.093
NetR2_2: R2.2 U2.2 | length 5
  Top Layer w0.508: U2.2@137.19,108.742 cw(c136.344,107.896) 137.541,107.896 cw(c138.738,107.896) U2.2@137.892,108.742 ; R2.2@137.361,107.114 ccw(c136.928,107.547) 137.541,107.547 ccw(c138.154,107.547) R2.2@137.721,107.114 ; R2.2@137.541,106.934 U2.2@137.541,109.093
NetR3_2: R3.2 U3.2 | length 5.1
  Top Layer w0.508: U3.2@121.188,108.742 cw(c120.342,107.896) 121.539,107.896 cw(c122.736,107.896) U3.2@121.89,108.742 ; R3.2@121.359,106.987 ccw(c120.926,107.42) 121.539,107.42 ccw(c122.152,107.42) R3.2@121.719,106.987 ; R3.2@121.539,106.807 U3.2@121.539,109.093
NetR4_2: R4.2 U4.2 | length 4.7
  Top Layer w0.508: U4.2@77.119,104.297 cw(c76.273,103.451) 77.47,103.451 cw(c78.667,103.451) U4.2@77.821,104.297 ; R4.2@77.29,102.669 ccw(c76.857,103.102) 77.47,103.102 ccw(c78.083,103.102) R4.2@77.65,102.669 ; R4.2@77.47,102.743 U4.2@77.47,104.648
NetR5_2: R5.2 U5.2 | length 4.6
  Top Layer w0.508: U5.2@91.915,104.297 cw(c91.068,103.451) 92.266,103.451 cw(c93.463,103.451) U5.2@92.616,104.297 ; 92.266,103.383 ccw(c93.096,103.383) R5.2@92.509,102.796 ; U5.2@92.266,104.648 92.266,102.679 R5.2@92.329,102.616
NetR6_2: R6.2 U6.2 | length 5.1
  Top Layer w0.508: U6.2@106.71,104.424 cw(c105.864,103.578) 107.061,103.578 cw(c108.258,103.578) U6.2@107.412,104.424 ; R6.2@106.881,102.669 ccw(c106.448,103.102) 107.061,103.102 ccw(c107.674,103.102) R6.2@107.241,102.669 ; R6.2@107.061,102.489 U6.2@107.061,104.775
NetR28_1: R28.1 U9.15 | length 13.3
  Top Layer w0.254: U9.15@125.745,55.753 125.745,54.087 126.111,53.721 134.112,53.721 134.366,53.467 R28.1@134.366,52.197 ; R28.1@134.097,52.466 ccw(c133.446,53.117) 134.366,53.117 ccw(c135.286,53.117) R28.1@134.635,52.466
NetRW1_1: RW1.1 WLR1.7 | length 8.1
  Top Layer w0.508: WLR1.7@189.103,60.579 RW1.1@193.802,60.579 ; WLR1.7@189.552,60.13 cw(c190.636,59.046) 190.636,60.579 cw(c190.636,62.112) WLR1.7@189.552,61.028 ; RW1.1@193.622,60.399 ccw(c193.189,59.966) 193.189,60.579 ccw(c193.189,61.192) RW1.1@193.622,60.759
NetRW2_2: RW2.2 U8.8 | length 14.4
  Top Layer w0.254: RW2.2@174.625,55.753 182.448,55.753 ; RW2.2@174.894,55.484 cw(c175.545,54.833) 175.545,55.753 cw(c175.545,56.673) RW2.2@174.894,56.022 ; U8.8@182.687,56.811 cw(c181.73,56.471) 182.448,55.753 ; 182.733,56.037 ccw(c182.15,56.62) U8.8@182.926,56.896 ; 183.017,56.322 ccw(c182.569,56.769) U8.8@183.166,56.981 ; U8.8@183.301,56.606 ccw(c182.989,56.918) U8.8@183.405,57.066 ; U8.8@183.566,56.871 182.448,55.753 ; U8.8@183.586,56.89 ccw(c183.408,57.067) U8.8@183.644,57.151
NetRW3_2: RW3.2 U8.6 | length 5.5
  Top Layer w0.254: RW3.2@174.625,58.166 177.952,58.166 U8.6@177.978,58.141 ; RW3.2@174.894,57.897 cw(c175.545,57.246) 175.545,58.166 cw(c175.545,59.086) RW3.2@174.894,58.435 ; 176.776,58.166 cw(c176.776,57.65) U8.6@177.141,58.015 ; 176.899,58.166 ccw(c176.899,58.509) U8.6@177.141,58.266
NetRW4_2: RW4.2 U8.4 | length 5.4
  Top Layer w0.254: RW4.2@174.663,60.681 U8.4@177.978,60.681 ; RW4.2@174.894,60.373 cw(c175.637,59.631) 175.637,60.681 ; RW4.2@174.894,60.912 ccw(c175.453,61.47) 175.453,60.681 ; U8.4@177.141,60.555 ccw(c176.837,60.251) 176.837,60.681 ccw(c176.837,61.11) U8.4@177.141,60.806
NetRW5_2: RW5.2 U8.2 | length 5.5
  Top Layer w0.254: RW5.2@174.625,63.221 U8.2@177.978,63.221 ; RW5.2@174.894,62.977 cw(c175.483,62.388) 175.483,63.221 ; RW5.2@174.894,63.515 ccw(c175.606,64.227) 175.606,63.221 ; U8.2@177.141,63.095 ccw(c176.837,62.791) 176.837,63.221 ccw(c176.837,63.65) U8.2@177.141,63.346
NetU8_1: U8.1 WLR1.3 | length 22.4
  Top Layer w0.254: U8.1@177.978,64.491 179.807,64.491 180.2,64.884 180.2,70.345 180.594,70.739 WLR1.3@189.103,70.739 ; U8.1@178.815,64.365 cw(c179.118,64.061) 179.118,64.491 cw(c179.118,64.92) U8.1@178.815,64.616 ; WLR1.3@188.564,70.2 ccw(c187.263,68.899) 187.263,70.739 ccw(c187.263,72.579) WLR1.3@188.564,71.278 ; WLR1.3@188.744,70.38 ccw(c187.877,69.513) 187.877,70.739 ccw(c187.877,71.965) WLR1.3@188.744,71.098
NetU8_3: U8.3 WLR1.4 | length 22.3
  Top Layer w0.254: U8.3@177.978,61.951 180.315,61.951 180.721,62.357 180.721,67.564 181.356,68.199 WLR1.4@189.103,68.199 ; U8.3@178.815,61.825 cw(c179.118,61.521) 179.118,61.951 cw(c179.118,62.38) U8.3@178.815,62.076 ; WLR1.4@188.564,67.66 ccw(c187.263,66.359) 187.263,68.199 ccw(c187.263,70.039) WLR1.4@188.564,68.738 ; WLR1.4@188.744,67.84 ccw(c187.877,66.973) 187.877,68.199 ccw(c187.877,69.425) WLR1.4@188.744,68.558
NetU8_5: U8.5 WLR1.5 | length 22.3
  Top Layer w0.254: U8.5@177.978,59.411 180.823,59.411 181.229,59.817 181.229,65.024 181.864,65.659 WLR1.5@189.103,65.659 ; U8.5@178.815,59.285 cw(c179.118,58.981) 179.118,59.411 cw(c179.118,59.84) U8.5@178.815,59.536 ; WLR1.5@188.564,65.12 ccw(c187.263,63.819) 187.263,65.659 ccw(c187.263,67.499) WLR1.5@188.564,66.198 ; WLR1.5@188.744,65.3 ccw(c187.877,64.433) 187.877,65.659 ccw(c187.877,66.885) WLR1.5@188.744,66.018
NetU8_9: U8.9 WLR1.6 | length 15.5
  Top Layer w0.254: U8.9@183.566,58.141 185.141,58.141 185.547,58.547 185.547,62.611 186.055,63.119 WLR1.6@189.103,63.119 ; U8.9@184.403,58.015 cw(c184.706,57.711) 184.706,58.141 cw(c184.706,58.57) U8.9@184.403,58.266 ; WLR1.6@188.564,62.58 ccw(c187.263,61.279) 187.263,63.119 ccw(c187.263,64.959) WLR1.6@188.564,63.658 ; WLR1.6@188.744,62.76 ccw(c187.877,61.893) 187.877,63.119 ccw(c187.877,64.345) WLR1.6@188.744,63.478
NRST: C16.2 R23.1 S1.1 U9.14 | length 137.6
  Top Layer w0.254: U9.14@125.245,55.372 125.245,53.698 125.857,53.086 132.207,53.086 132.715,52.578 132.715,18.161 133.985,16.891 v2(157.099,16.891) ; v2@156.74,16.532 ccw(c155.873,15.665) 155.873,16.891 ccw(c155.873,18.117) v2@156.74,17.25
  Top Layer w0.508: R23.1@186.817,16.891 186.944,17.018 197.866,17.018 198.374,17.526 C16.2@198.374,19.177 ; R23.1@187.503,17.018 cw(c187.503,15.148) S1.1@188.825,16.47 ; R23.1@187.579,17.111 ccw(c187.893,17.654) 188.055,17.048 ; R23.1@187.615,16.696 cw(c188.04,16.19) 188.211,16.828 ; R23.1@187.632,16.711 cw(c188.372,15.971) 188.372,17.018 ; R23.1@187.672,16.764 cw(c188.191,16.465) 188.036,17.043 ; R23.1@187.942,17.018 ccw(c187.942,18.267) S1.1@188.825,17.384 ; S1.1@189.739,16.47 cw(c191.061,15.148) 191.061,17.018 ; S1.1@189.739,17.384 ccw(c190.622,18.267) 190.622,17.018 ; 194.003,17.018 cw(c194.003,15.148) S1.1@195.325,16.47 ; 194.442,17.018 ccw(c194.442,18.267) S1.1@195.325,17.384 ; S1.1@196.239,16.47 cw(c197.561,15.148) 197.561,17.018 ; S1.1@196.239,17.384 ccw(c197.122,18.267) 197.122,17.018 ; C16.2@198.105,18.908 cw(c197.454,18.257) 198.374,18.257 cw(c199.294,18.257) C16.2@198.643,18.908
  Bottom Layer w0.254: v2(157.099,16.891) 157.127,16.863 189.218,16.863 S1.1@189.282,16.927 ; v2@157.279,17.071 ccw(c157.78,17.572) 157.78,16.863 ; v2@157.458,16.532 cw(c158.258,15.732) 158.258,16.863 ; v2@157.458,17.25 ccw(c158.393,18.185) 158.393,16.863 ; 187.261,16.863 ccw(c187.261,18.948) S1.1@188.735,17.474 ; 187.57,16.863 cw(c187.57,15.215) S1.1@188.735,16.38 ; 187.875,16.863 ccw(c187.875,18.334) S1.1@188.915,17.294 ; 188.184,16.863 cw(c188.184,15.829) S1.1@188.915,16.56
OSC32_IN: C18.2 U9.8 Y2.2 | length 14.2
  Top Layer w0.254: C18.2@120.809,50.407 ccw(c118.879,52.451) Y2.2@121.69,52.451 C18.2@121.69,50.443 ; C18.2@120.984,50.223 ccw(c119.436,51.862) 121.69,51.862 ; C18.2@121.158,50.038 ccw(c119.992,51.272) 121.69,51.272 ; C18.2@121.332,49.853 ccw(c120.549,50.683) 121.69,50.683 ; Y2.2@121.426,52.187 cw(c120.789,51.551) 121.69,51.551 cw(c122.59,51.551) Y2.2@121.954,52.187 ; Y2.2@121.69,52.824 ccw(c121.69,53.418) 122.11,52.998 ; Y2.2@121.817,52.705 122.245,53.133 ; Y2.2@122.056,52.521 cw(c122.729,52.649) 122.245,53.133 ; U9.8@122.245,55.753 122.245,53.133
OSC32_OUT: C19.2 U9.9 Y2.1 | length 11.9
  Top Layer w0.254: U9.9@122.745,55.753 122.745,53.277 Y2.1@123.317,52.705 ; C19.2@123.19,50.165 Y2.1@123.19,52.451 ccw(c126.055,52.451) C19.2@124.053,50.401 ; C19.2@123.19,50.641 ccw(c124.287,50.641) C19.2@123.521,49.856 ; 123.19,51.244 ccw(c124.877,51.244) C19.2@123.698,50.038 ; 123.19,51.848 ccw(c125.466,51.848) C19.2@123.875,50.22
OSC_IN: C20.2 U9.12 Y1.2 | length 26.3
  Top Layer w0.254: U9.12@124.245,55.753 124.245,52.031 125.476,50.8 125.476,46.101 125.857,45.72 ; Y1.2@126.899,45.268 ccw(c125.857,44.292) 125.857,45.72 ; Y1.2@126.899,46.172 cw(c125.857,47.148) 125.857,45.72 ; Y1.2@127.084,45.442 ccw(c126.443,44.841) 126.443,45.72 ccw(c126.443,46.599) Y1.2@127.084,45.998 ; Y1.2@127.668,45.433 cw(c128.362,44.739) 128.362,45.72 cw(c128.362,46.701) Y1.2@127.668,46.007 ; Y1.2@127.848,45.253 cw(c128.975,44.126) 128.975,45.72 cw(c128.975,47.314) Y1.2@127.848,46.187 ; C20.2@130.683,44.577 ccw(c129.457,44.577) 130.324,45.444 ccw(c131.191,46.311) C20.2@131.191,45.085 ; C20.2@131.191,44.577 130.048,45.72 Y1.2@127.381,45.72 125.857,45.72
OSC_OUT: C17.2 U9.13 Y1.1 | length 18.8
  Top Layer w0.254: U9.13@124.745,55.753 124.745,52.166 126.111,50.8 ; Y1.1@126.84,50.421 ccw(c126.111,49.909) 126.111,50.8 ; Y1.1@126.84,51.179 cw(c126.111,51.691) 126.111,50.8 ; Y1.1@127.668,50.513 cw(c128.362,49.819) 128.362,50.8 cw(c128.362,51.781) Y1.1@127.668,51.087 ; Y1.1@127.848,50.333 cw(c128.975,49.206) 128.975,50.8 cw(c128.975,52.394) Y1.1@127.848,51.267 ; C17.2@130.683,51.943 cw(c129.457,51.943) 130.324,51.076 cw(c131.191,50.209) C17.2@131.191,51.435 ; C17.2@131.191,51.943 130.048,50.8 Y1.1@127.381,50.8 126.111,50.8
P: CP1.1 JD1.3 P6.1 P6.2 P9.1 R16.2 R17.2 | length 274.5
  Bottom Layer w5.08: 5.207,132.588 34.544,132.588 ; R16.2@6.762,16.407 15.741,16.407 21.813,22.479 21.813,33.528 ; JD1.3@21.813,51.848 21.813,33.528 ; P9.1@34.378,137.479 34.378,132.754 34.544,132.588 ; CP1.1@71.882,24.892 71.882,34.163 65.913,34.163 ; 21.813,33.528 22.448,34.163 65.913,34.163 ; 34.544,132.588 60.96,132.588 65.913,127.635 65.913,34.163
  Bottom Layer w7.62: 71.882,34.163 R17.2@71.882,40.894
PWM_UN: R6.1 TP5.0 U9.67 | length 49.4
  Top Layer w0.381: R6.1@107.061,100.203 121.92,100.203 122.745,99.378 U9.67@122.745,70.572 ; R6.1@107.413,99.978 cw(c107.955,99.436) 107.955,100.203 cw(c107.955,100.97) R6.1@107.413,100.428 ; 107.713,100.203 cw(c107.713,98.696) TP5.0@108.779,99.762 ; 108.326,100.203 ccw(c108.326,100.843) TP5.0@108.779,100.39 ; TP5.0@109.407,99.762 cw(c110.473,98.696) 110.473,100.203 ; TP5.0@109.407,100.39 ccw(c109.86,100.843) 109.86,100.203
PWM_UP: R1.1 TP6.0 U9.52 | length 58.5
  Top Layer w0.381: U9.52@130.245,70.572 130.245,72.714 130.81,73.279 152.273,73.279 153.543,74.549 153.543,103.945 R1.1@153.768,104.169 ; TP6.0@151.511,104.267 151.638,104.394 R1.1@153.543,104.394 ; TP6.0@151.825,104.581 ccw(c152.278,105.034) 152.278,104.394
PWM_VN: R5.1 TP4.0 U9.68 | length 64.4
  Top Layer w0.381: R5.1@92.104,100.105 cw(c91.562,99.563) 92.329,99.563 cw(c93.096,99.563) R5.1@92.554,100.105 ; R5.1@92.681,100.105 cw(c93.223,99.563) 93.223,100.33 cw(c93.223,101.097) R5.1@92.681,100.555 ; TP4.0@94.301,100.016 ccw(c93.542,99.257) 93.542,100.33 ccw(c93.542,101.403) TP4.0@94.301,100.644 ; TP4.0@94.615,100.33 R5.1@92.329,100.33 92.329,98.552 93.218,97.663 119.253,97.663 120.142,96.774 120.142,75.692 120.523,75.311 121.539,75.311 122.245,74.605 U9.68@122.245,70.572
PWM_VP: R2.1 TP1.0 U9.53 | length 47.6
  Top Layer w0.381: U9.53@129.745,70.572 129.745,96.266 129.745,103.837 130.556,104.648 R2.1@137.541,104.648 TP1.0@137.541,102.489 ; R2.1@137.189,104.423 ccw(c136.647,103.881) 136.647,104.648 ccw(c136.647,105.415) R2.1@137.189,104.873 ; TP1.0@137.227,102.803 ccw(c136.468,103.562) 137.541,103.562 ccw(c138.614,103.562) TP1.0@137.855,102.803 ; R2.1@137.316,104.423 cw(c136.774,103.881) 137.541,103.881 cw(c138.308,103.881) R2.1@137.766,104.423
PWM_WN: R4.1 TP3.0 U9.69 | length 75.4
  Top Layer w0.381: 78.735,100.203 ccw(c78.735,100.843) TP3.0@79.188,100.39 ; TP3.0@79.502,100.076 79.375,100.203 R4.1@77.47,100.203 77.47,75.819 78.613,74.676 121.031,74.676 121.745,73.962 U9.69@121.745,70.572
PWM_WP: R3.1 TP2.0 U9.54 | length 46.8
  Top Layer w0.381: TP2.0@121.098,102.93 ccw(c120.032,103.996) 121.539,103.996 ; R3.1@121.314,104.296 cw(c120.772,103.754) 121.539,103.754 cw(c122.306,103.754) R3.1@121.764,104.296 ; TP2.0@121.412,102.616 121.539,102.743 R3.1@121.539,104.521 125.984,104.521 126.619,103.886 126.619,73.787 127.127,73.279 128.778,73.279 129.245,72.812 U9.54@129.245,70.572 ; 121.539,103.383 ccw(c122.179,103.383) TP2.0@121.726,102.93 ; R3.1@121.891,104.296 cw(c122.433,103.754) 122.433,104.521 cw(c122.433,105.288) R3.1@121.891,104.746
SWCLK: P11.2 U9.76 | length 136.8
  Top Layer w0.381: U9.76@117.145,68.972 111.517,68.972 110.363,67.818 110.363,30.353 111.379,29.337 v2(131.572,29.337) ; v2@131.258,29.023 ccw(c130.499,28.264) 130.499,29.337 ccw(c130.499,30.41) v2@131.258,29.651 ; v2(174.117,29.337) P11.2@193.167,29.337 ; v2@174.431,29.023 cw(c175.19,28.264) 175.19,29.337 cw(c175.19,30.41) v2@174.431,29.651 ; P11.2@192.898,28.941 ccw(c191.943,27.986) 191.943,29.337 ccw(c191.943,30.688) P11.2@192.898,29.733
  Bottom Layer w0.381: v2(131.572,29.337) v2(174.117,29.337) ; v2@131.886,29.023 cw(c132.645,28.264) 132.645,29.337 cw(c132.645,30.41) v2@131.886,29.651 ; v2@173.803,29.023 ccw(c173.044,28.264) 173.044,29.337 ccw(c173.044,30.41) v2@173.803,29.651
SWDIO: P11.1 U9.72 | length 131
  Top Layer w0.381: v3@120.11,68.588 ccw(c119.785,68.913) 120.245,68.913 ccw(c120.705,68.913) v3@120.38,68.588 ; v3(120.245,68.453) U9.72@120.245,70.572
  Bottom Layer w0.381: v3@120.11,68.318 ccw(c119.785,67.993) 119.785,68.453 ccw(c119.785,68.913) v3@120.11,68.588 ; v3@120.269,68.453 114.935,68.453 113.919,67.437 113.919,32.512 114.808,31.623 188.976,31.623 189.611,30.988 189.611,27.559 190.373,26.797 P11.1@193.167,26.797 ; P11.1@192.898,26.401 ccw(c191.943,25.446) 191.943,26.797 ccw(c191.943,28.148) P11.1@192.898,27.193
UART3_RX: P10.2 U9.48 | length 79.4
  Top Layer w0.254: U9.48@132.345,67.972 160.174,67.972 161.417,69.215 161.417,79.121 162.433,80.137 P10.2@197.104,80.137 ; P10.2@196.663,79.696 ccw(c195.6,78.633) 195.6,80.137 ccw(c195.6,81.641) P10.2@196.663,80.578 ; P10.2@196.843,79.876 ccw(c196.213,79.246) 196.213,80.137 ccw(c196.213,81.028) P10.2@196.843,80.398
UART3_TX: P10.1 U9.47 | length 77.6
  Top Layer w0.254: U9.47@132.345,67.472 161.325,67.472 162.306,68.453 162.306,76.835 163.068,77.597 P10.1@197.104,77.597 ; P10.1@196.663,77.156 ccw(c195.6,76.093) 195.6,77.597 ccw(c195.6,79.101) P10.1@196.663,78.038 ; P10.1@196.843,77.336 ccw(c196.213,76.706) 196.213,77.597 ccw(c196.213,78.488) P10.1@196.843,77.858
VBAT: BT1.1 U9.6 | length 17.5
  Top Layer w0.254: BT1.1@114.173,52.959 120.777,52.959 121.245,53.427 U9.6@121.245,54.602 ; BT1.1@115.208,53.521 ccw(c116.564,54.877) 116.564,52.959 ccw(c116.564,51.295) BT1.1@115.387,52.472 ; BT1.1@115.387,53.7 ccw(c117.178,55.491) 117.178,52.959 ccw(c117.178,50.681) BT1.1@115.567,52.292 ; BT1.1@115.567,53.88 ccw(c117.791,56.104) 117.791,52.959
WORK_SINGLE: D2.2 U9.98 | length 70.4
  Top Layer w0.254: D2.2@92.583,11.811 92.583,17.79 92.215,18.158 92.215,31.636 93.218,32.639 v2@101.6,32.639 ; v2@111.76,32.385 v2(111.76,32.639) 111.76,57.531 112.201,57.972 U9.98@117.145,57.972
  Bottom Layer w0.254: v2(101.854,32.639) v2(111.76,32.639)
pads on no net: 1.0 1.3 1.7 1.8 1.9 1.10 1.11 1.12 1.13 1.14 1.16 1.18 H1.0 H2.0 H3.0 H4.0 H5.0 IPM？1.A IPM？1.B JD1.6 P9.2 U1.1 U1.4 U2.1 U2.4 U3.1 U3.4 U4.1 U4.4 U5.1 U5.4 U6.1 U6.4 U7. U8.10 U8.12 U9.2 U9.3 U9.4 U9.5 U9.7 U9.16 U9.17 U9.18 U9.23 U9.24 U9.25 U9.26 U9.29 U9.30 U9.31 U9.32 U9.33 U9.41 U9.42 U9.43 U9.44 U9.45 U9.46 U9.51 U9.55 U9.56 U9.57 U9.58 U9.59 U9.60 U9.61 U9.62 U9.63 U9.64 U9.65 U9.66 U9.70 U9.71 U9.73 U9.77 U9.78 U9.79 U9.81 U9.82 U9.83 U9.84 U9.85 U9.86 U9.87 U9.88 U9.89 U9.90 U9.91 U9.92 U9.93 U9.95 U9.96 U9.97 WLR1.8
copper on no net:
  other v1: 5,2.663 195,2.663 3.351,3.351 6.651,3.349 193.351,3.351 196.651,3.349 2.638,5 7.362,5 192.638,5 197.362,5 3.344,6.656 6.662,6.662 193.344,6.656 196.662,6.662 5,7.362 195,7.362 100,87.663 195,87.663 98.351,88.351 101.651,88.349 193.351,88.351 196.651,88.349 97.638,90 102.362,90 192.638,90 197.362,90 98.344,91.656 193.344,91.656 101.662,91.662 196.662,91.662 100,92.362 195,92.362 5,142.663 3.351,143.351 6.651,143.349 2.638,145 7.362,145 3.344,146.656 6.662,146.662 5,147.362

## Polygon pours and split planes (outlines as drawn)
GND on Top Layer "Top Layer-No Net" (solid, remove dead copper, pour order 6): 197.303,11.019 197.303,87.771 162.345,87.771 162.959,88.406 162.959,120.122 71.823,120.122 71.7,120.249 72.436,119.487 72.436,49.078 86.174,49.078 86.297,49.205 86.297,1.758 188.717,1.758 188.717,7.847 188.717,7.974 191.784,11.146

## Keep-outs
Keep-Out Layer:
  lines w0.254: 0,5 ccw(c5,5) 5,0 195,0 ccw(c195,5) 200,5 200,145 ccw(c195,145) 195,150 5,150 ccw(c5,145) 0,145 0,5
  lines w0.508: 24.511,101.854 30.607,101.854 ; 24.511,107.061 30.988,107.061 ; 30.353,81.153 52.07,81.153 ; 32.639,74.422 46.609,74.422

## Silkscreen, mask and mechanical layers (free items; w line width, h text height)
Top Overlay:
  text "N+" at 42.672,146.558 h2.54 r180
  text "N-" at 45.212,146.558 h2.54 r180
  text "W+" at 50.419,146.558 h2.54 r180
  text "W-" at 52.959,146.558 h2.54 r180
  text "V+" at 58.674,146.558 h2.54 r180
  text "V-" at 61.214,146.558 h2.54 r180
  text "U+" at 66.675,146.558 h2.54 r180
  text "U-" at 69.215,146.558 h2.54 r180
  text "15" at 73.025,146.558 h2.54 r180
  text "G" at 75.692,146.558 h2.54 r180
  text "5" at 78.232,146.558 h2.54 r180
  text "P" at 0.254,133.731 h5.08 r270
  text "N" at 17.272,131.445 h7.62 r180
  text "P" at 35.052,131.445 h7.62 r180
  text "P" at 193.929,130.175 h7.62 r90
  text "N" at 0.254,123.952 h5.08 r270
  text "高压危险！" at 56.007,123.698 h12.7 r270
  text "N" at 193.929,110.363 h7.62 r90
  text "G" at 195.475,81.915 h2.54 r90
  text "R" at 195.453,79.375 h2.54 r90
  text "T" at 195.453,76.962 h2.54 r90
  text "ENTER" at 130.81,3.901 h2.03
  text "UP" at 143.51,3.919 h2.03
  text "DOWN" at 153.289,3.919 h2.03
  text "BACK" at 165.354,3.919 h2.03
Top Solder:
  lines w3.81: 12.127,104.343 32.018,104.343 ; 32.018,104.253 39.116,97.155 40.132,96.139 50.292,96.139
  lines w5.08: 12.127,94.753 27.802,94.753 37.719,84.836 38.1,84.455 50.292,84.455 ; 12.127,113.753 35.218,113.753 40.894,108.077 49.657,108.077

## Text inside footprints (layer, text, board x,y; h text height)
1: Top Overlay "20" at 104.574,21.192 h1.52
BT1: Top Overlay "+" at 110.574,54.153 h1.5; Top Overlay "-" at 101.811,54.254 h1.5
CP3: Mechanical 1 "C1" at 81.055,70.935 h0.75 r180
CP4: Mechanical 1 "C1" at 88.109,60.51 h0.75
WLR1: Top Overlay "VCC" at 186.182,74.625 h1.02 r270; Top Overlay "VT" at 186.182,61.011 h1.02 r270; Top Overlay "GND" at 186.233,77.648 h1.02 r270; Top Overlay "A" at 190.551,71.145 h1.02 r270; Top Overlay "B" at 190.551,68.622 h1.02 r270; Top Overlay "C" at 190.551,66.099 h1.02 r270; Top Overlay "D" at 190.551,63.576 h1.02 r270